# Altium PCB 02-碰撞模块-电路板图.PcbDoc
Units mm, origin at the board's own origin, x right, y up, seen from the top; angles counter-clockwise.
Board outline 36 x 36 mm, 2 copper layers (Top Layer, Bottom Layer); 4 components, 3 nets, 22 pads, 3 vias.
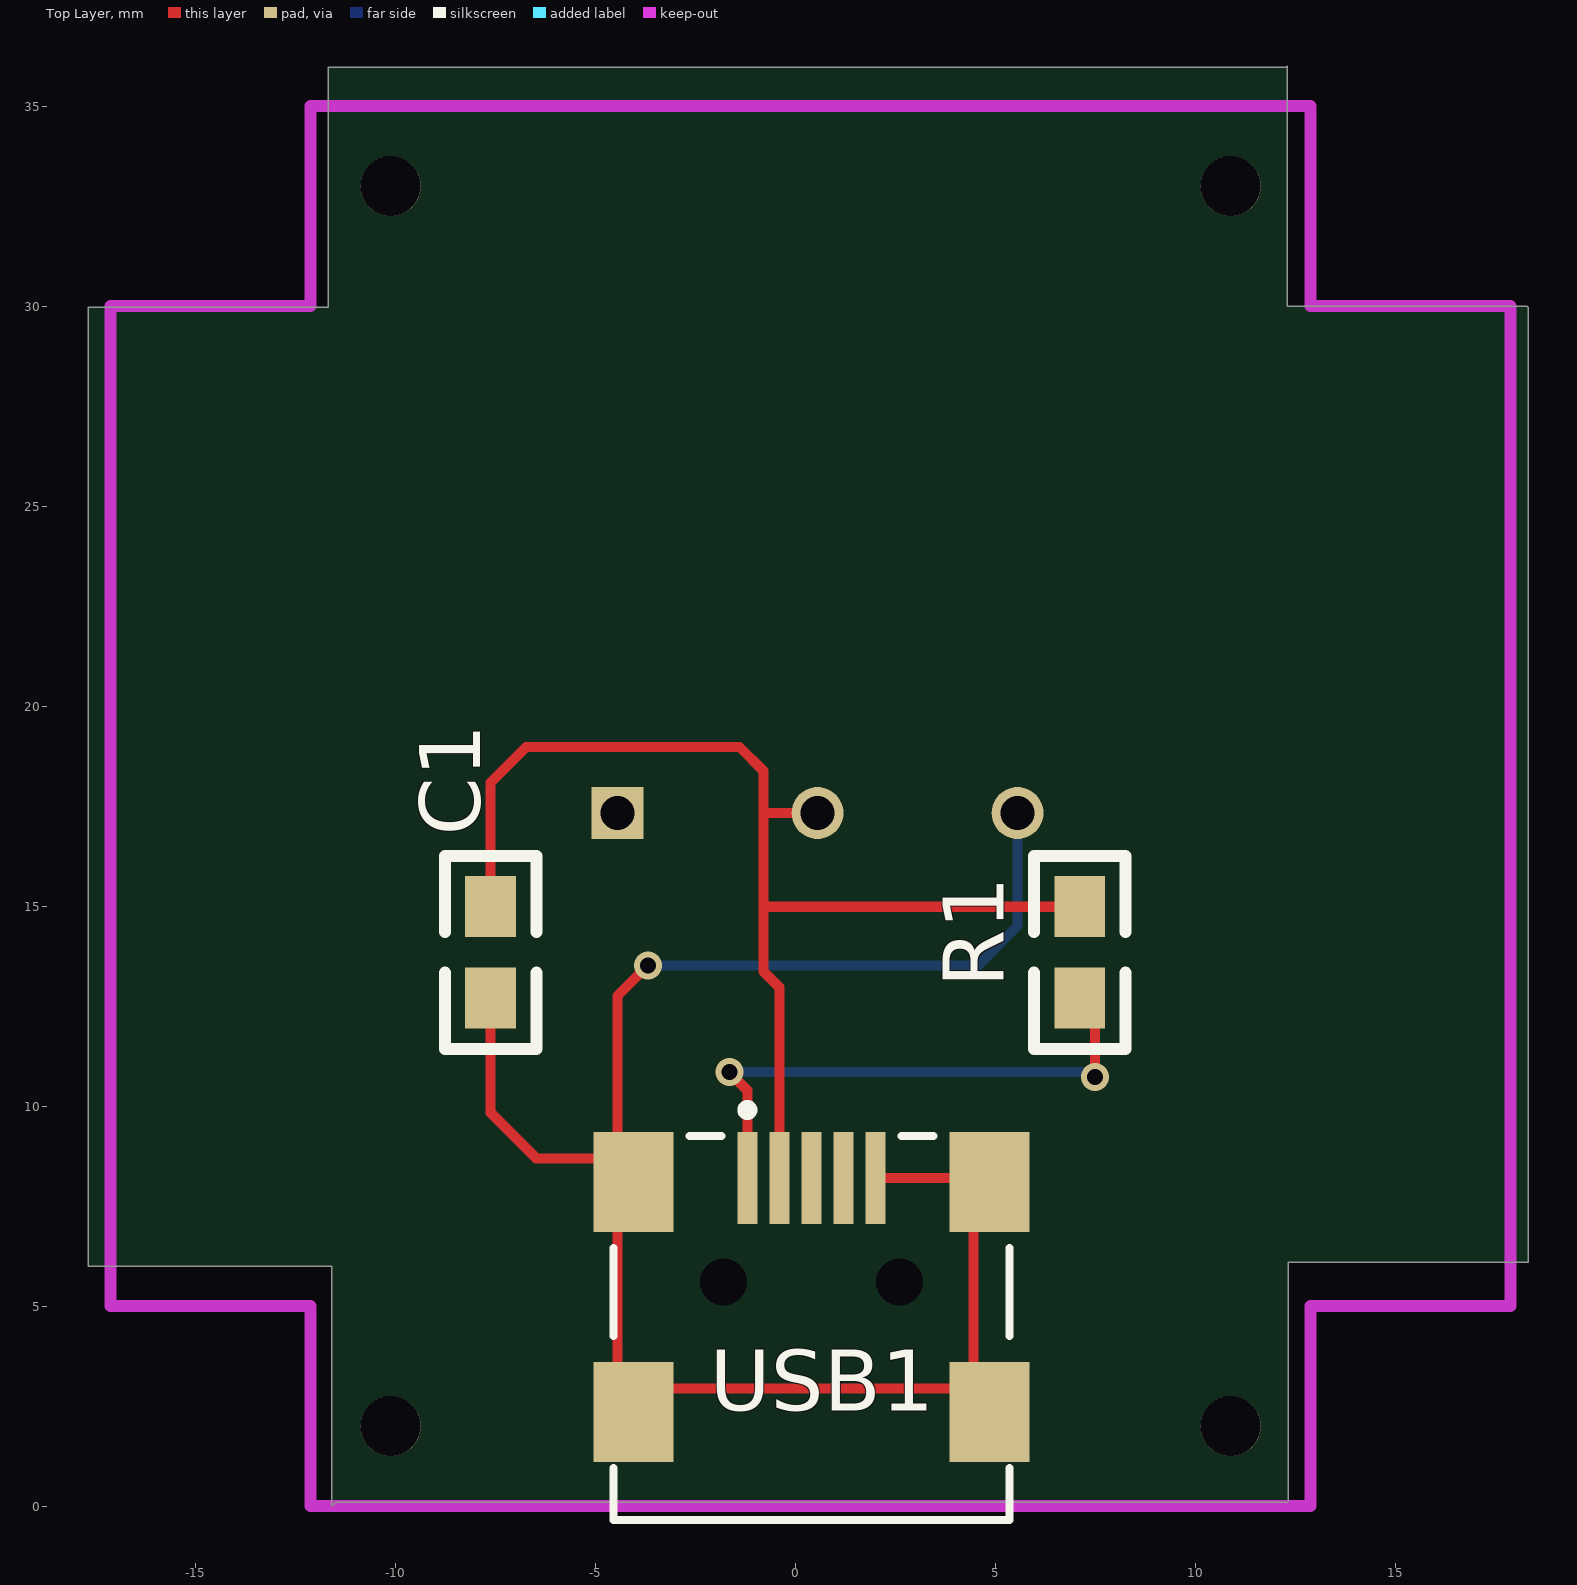
[diagram p0: Top Layer view]
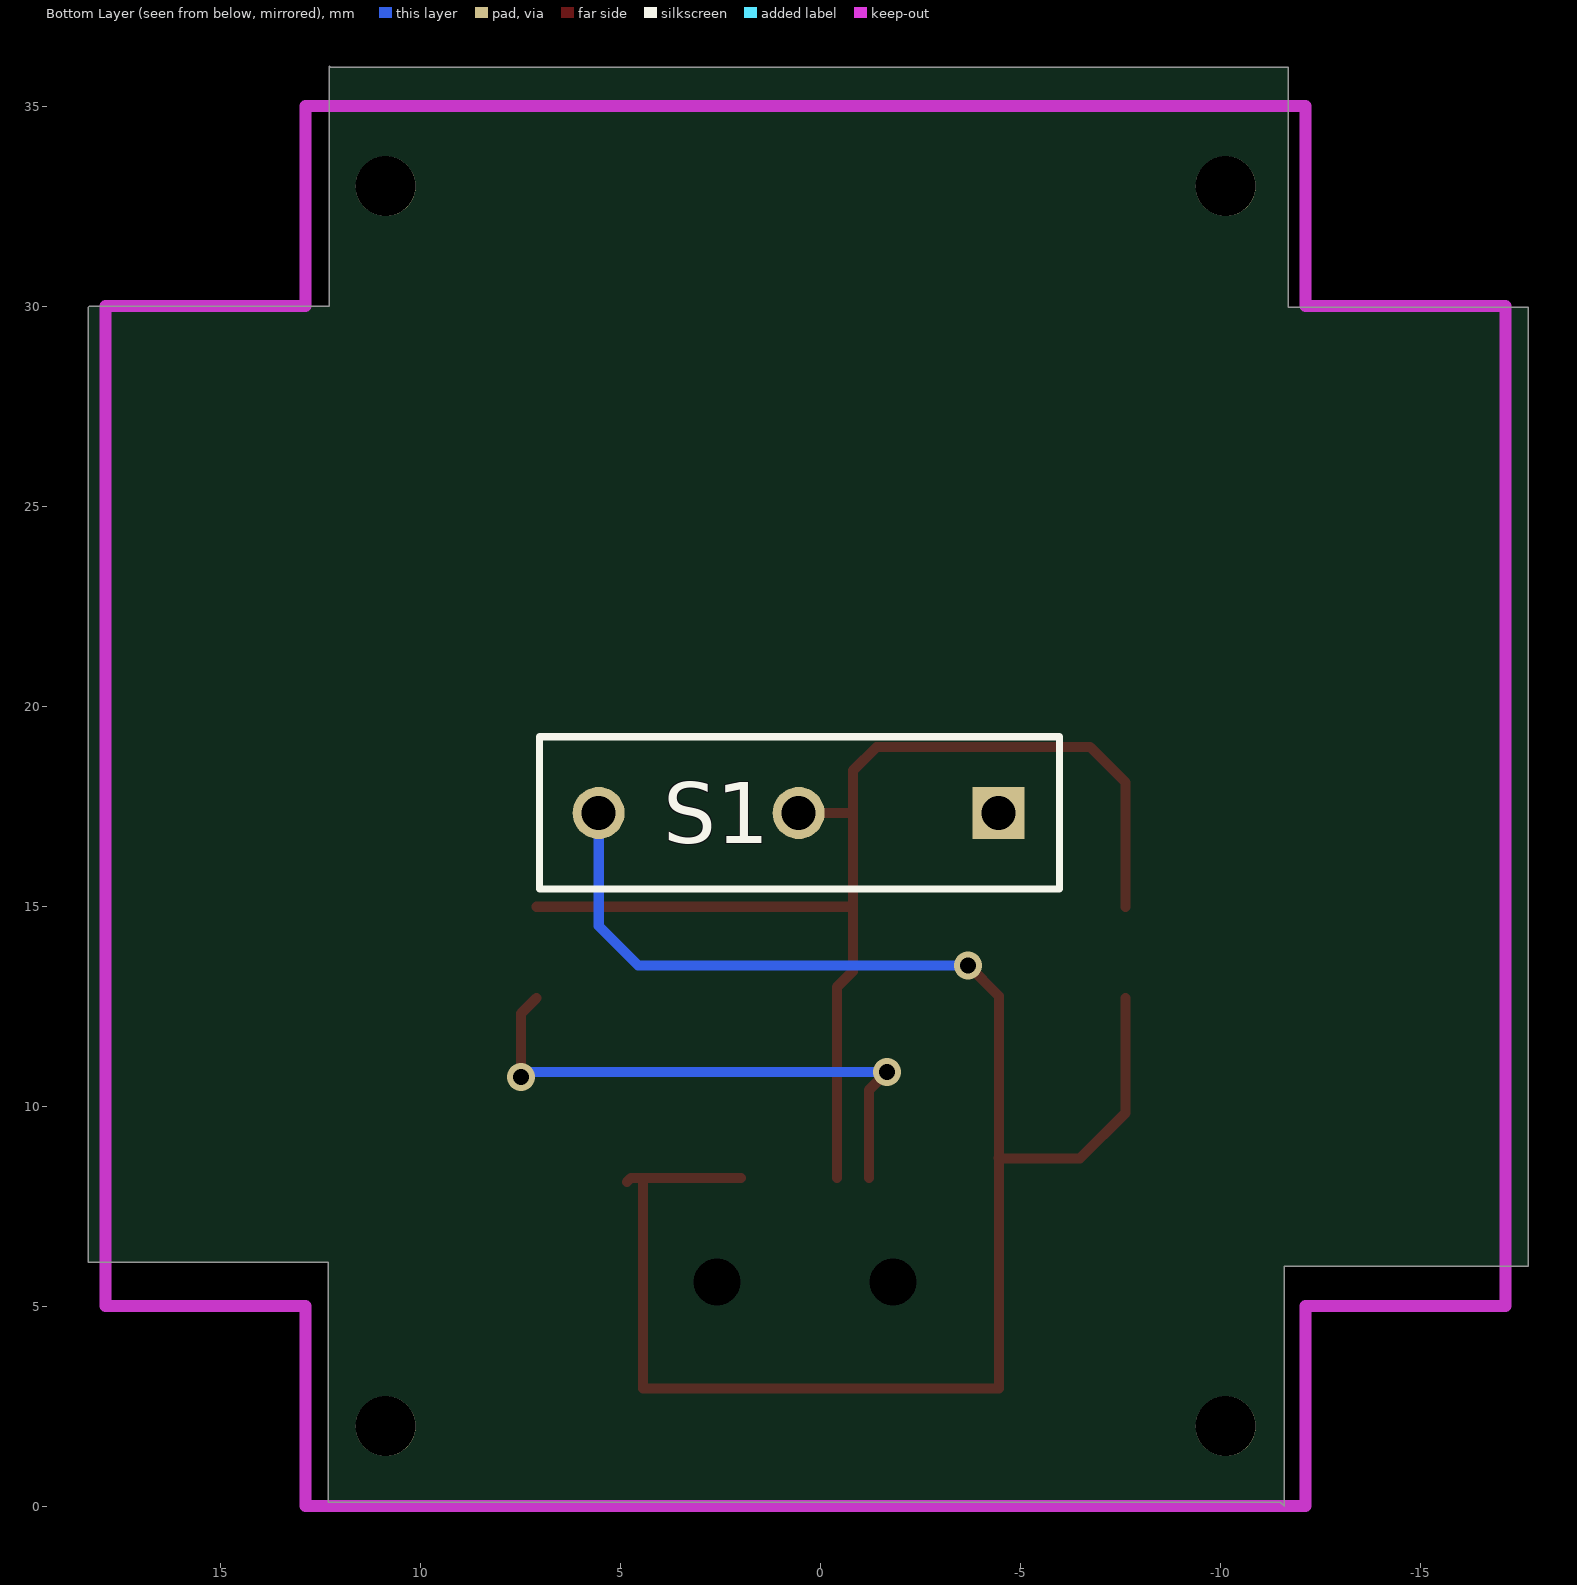
[diagram p1: Bottom Layer view, seen from below]

## Layer stack, top to bottom
Top Solder: solder mask 0.0102, Solder Resist, Dk 3.5
Top Layer: signal copper 0.0356
Dielectric1: dielectric 0.32, FR-4, Dk 4.8
Bottom Layer: signal copper 0.0356
Bottom Solder: solder mask 0.0102, Solder Resist, Dk 3.5

## Board outline
-11.681,35.969 12.26,35.969 12.291,36 12.291,30 18.288,30 18.319,29.969 18.319,6.096 12.319,6.096 12.319,0.099 -11.486,0.099 -11.585,0 -11.585,6 -17.681,6 -17.681,29.972 -11.681,29.972

## Design rules (kind name [scope] priority, off if disabled: settings)
Clearance [All] p1: gap=0.254
PolygonConnect [All] p1: connectstyle=Relief reliefconductorwidth=0.254 reliefentries=4 polygonreliefangle="90 Angle" airgapwidth=0.254
RoutingVias [All] p1: holewidth=0.4 width=0.7 viastyle="Through Hole" minholewidth=0.4 minwidth=0.7 maxholewidth=0.4 maxwidth=0.7
SilkToSolderMaskClearance SilkscreenOverComponentPads [IsPad] p1: minsilkscreentomaskgap=0.254 clearancetoexposedcopper=TRUE
SolderMaskExpansion [All] p1: expansion=0.102
Width [All] p1: maxlimit=0.254 minlimit=0.254 preferedwidth=0.254
29 further rules are at their usual default settings.

## Components (designator, comment, footprint, x,y, rotation, side; value= is the part's Value field where it differs from the comment)
C1 "Cap" 0805 -7.62,12.7 r90 top
R1 "Res2" 0805 7.11,12.7 r90 top
S1 "SW-SPDT" key -4.445,17.328 r0 bottom
USB1 "Mini USB" USB/SM0.8-6H5 0.527,5.56 r90 top

## Footprints (in the part's own frame and the unit in brackets; to place one, negate y for a bottom-side part, rotate by r counter-clockwise, add the part's x,y. Pads: shape width x height; smd on the part's side, far side on the other; paste and mask are expansions set on the pad)
0805 [mil]
  rect 60x50 smd: 1(0,-0.06) 2(90,-0.06)
  silkscreen extent -50,-45 140,45
key [mm]
  rect 1.3x1.3 hole 0.85: 1(0,0)
  round 1.3 hole 0.85: 2(5,0) 3(10,0)
  silkscreen extent -1.52,-1.91 11.48,1.91
USB/SM0.8-6H5 [mm]
  rect 2.3x0.5 smd: 1(2.643,1.727) 2(2.643,0.927) 3(2.643,0.127) 4(2.643,-0.673) 5(2.643,-1.473)
  rect 2.5x2 smd: 5(-3.211,4.577) 5(-3.211,-4.323) 5(2.543,4.577) 5(2.543,-4.323)
  round 0.6 hole 1.17 unplated: MH1(0.043,-2.073) MH2(0.043,2.327)
  silkscreen extent -5.91,-4.82 4.47,5.08

## Part data
C1: "Capacitor"
R1: "Resistor"
S1: "SPDT Subminiature Toggle Switch, Right Angle Mounting, Vertical Actuation"

## Free pads (board coordinates)
  round 1.5 hole 1.5: 0(-10.119,2) 0(-10.119,33) 0(10.881,2) 0(10.881,33)

## Via types
v1: diameter 0.7, hole 0.4, Top Layer to Bottom Layer, 3 vias

## Nets (pads, with @x,y where several pads share a name; then routed paths per layer and width w, separated by ;. In a path a pad name is that pad's centre, name@x,y a point inside that pad or via, vN(x,y) a via of type N, cw(c..) or ccw(c..) an arc to the next point about the centre after c; other vN are vias at no path point)
GND: C1.1 S1.3 USB1.5 | length 46.9
  Top Layer w0.254: C1.1 -7.618,9.835 -6.477,8.694 -4.451,8.694 USB1.5@-4.45,8.695 ; USB1.5@-4.445,8.7 USB1.5@-4.45,8.695 ; v1(-3.683,13.518) -4.45,12.751 USB1.5@-4.45,8.695 ; USB1.5@2,8.203 USB1.5@4.45,8.203 ; USB1.5@4.85,8.103 4.75,8.203 USB1.5@4.45,8.203 ; USB1.5@-4.45,8.695 -4.45,2.941 4.45,2.941 USB1.5@4.45,8.203
  Bottom Layer w0.254: v1(-3.683,13.518) 4.572,13.518 5.555,14.501 S1.3
NetC1_2: C1.2 R1.2 S1.2 USB1.2 | length 30.2
  Top Layer w0.254: C1.2 -7.618,18.092 -6.731,18.979 -1.397,18.979 -0.8,18.382 -0.8,17.328 ; USB1.2 -0.4,12.973 -0.8,13.373 -0.8,14.986 ; S1.2 -0.8,17.328 ; R1.2 -0.8,14.986 ; -0.8,14.986 -0.8,17.328
VCC: R1.1 USB1.1 | length 14.2
  Top Layer w0.254: v1(-1.651,10.851) -1.2,10.4 USB1.1 ; R1.1 7.493,12.319 v1(7.493,10.724)
  Bottom Layer w0.254: v1(-1.651,10.851) 7.366,10.851 v1(7.493,10.724)
pads on no net: S1.1 USB1.3 USB1.4 USB1.MH1 USB1.MH2

## Keep-outs
Keep-Out Layer:
  lines w0.3: -11.585,0 12.291,0 ; -17.119,5 -17.119,30 -12.119,30 -12.119,35 12.881,35 12.881,30 17.881,30 17.881,5 12.881,5 12.881,0 -12.119,0 -12.119,5 -17.119,5